# Altium PCB BSR033A.PcbDoc (part 2 of 2)
Units mil, origin at the board's own origin, x right, y up, seen from the top; angles counter-clockwise.
Board outline 1950 x 1400 mil, 2 copper layers (Top Layer, Bottom Layer), stack 61.2 mil thick; 52 components, 17 nets, 86 pads, 24 vias.
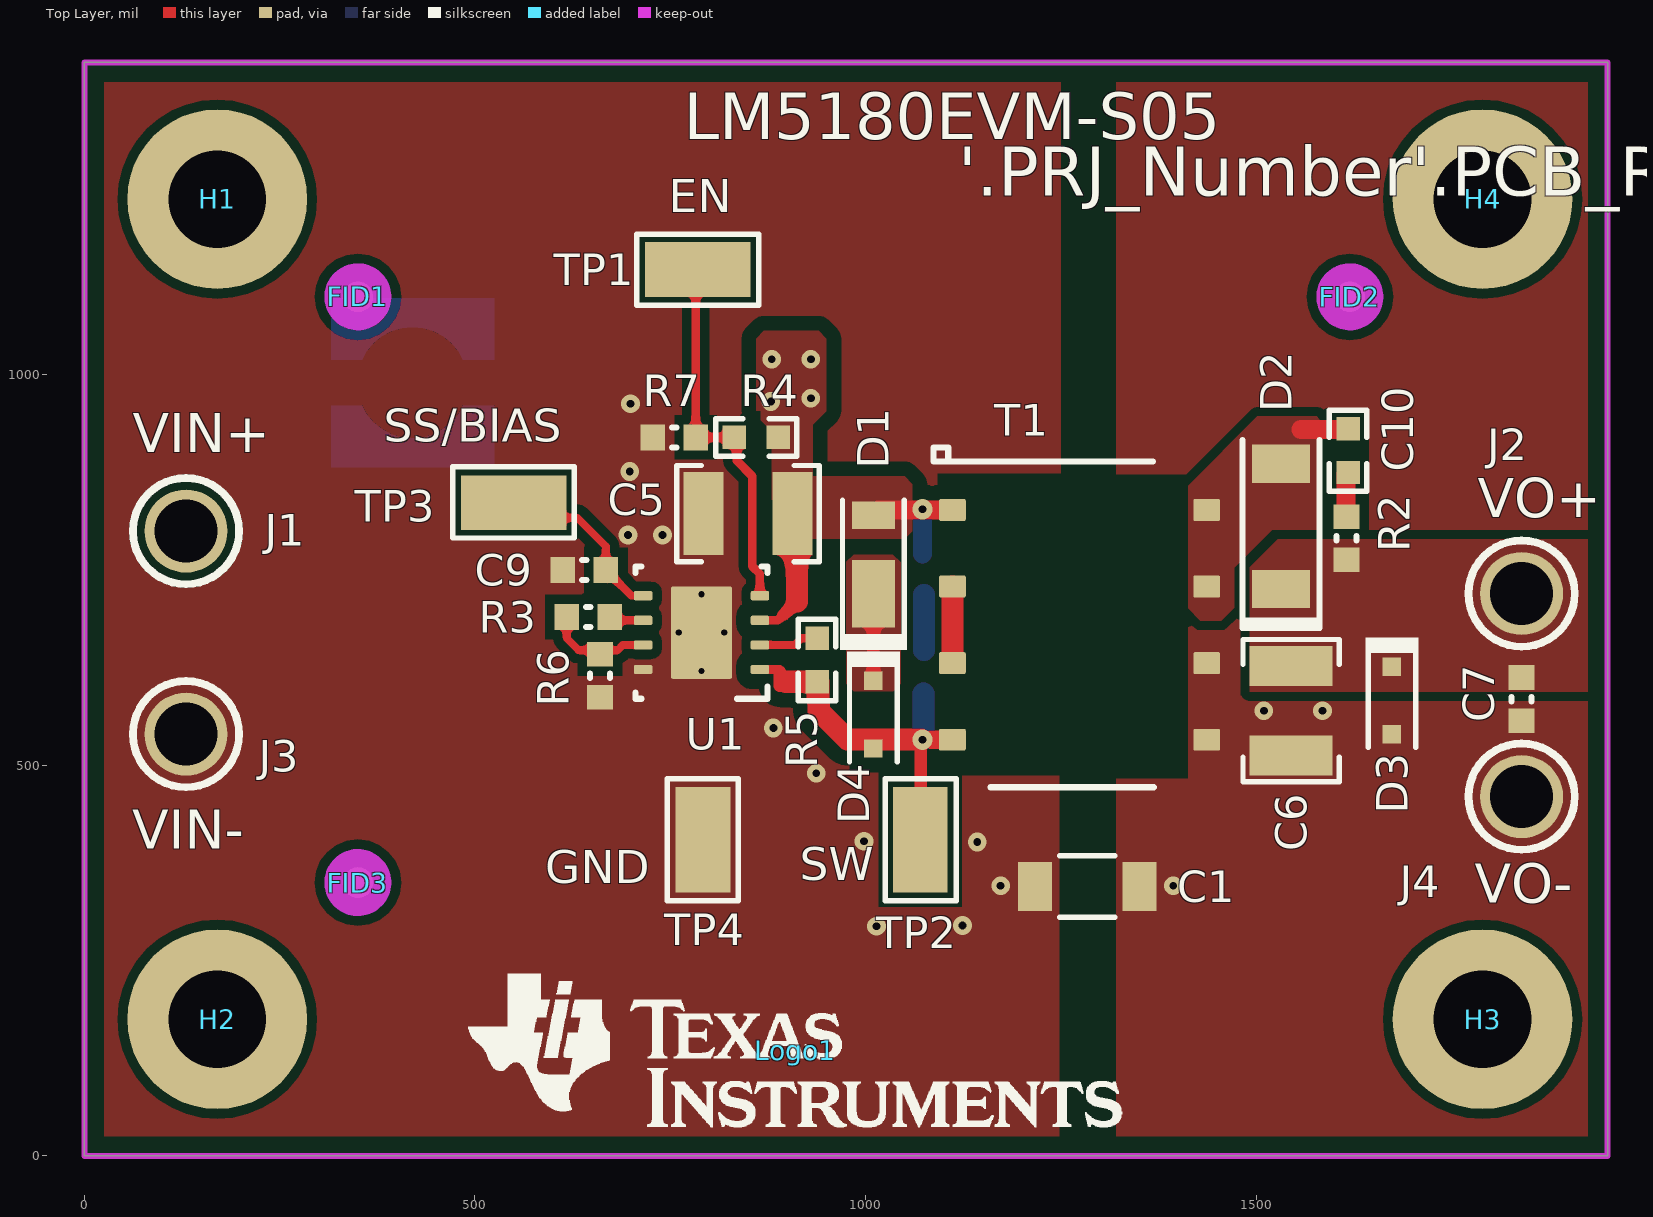
[diagram p0: Top Layer view]

## Silkscreen, mask and mechanical layers (free items; w line width, h text height) (continued)
M10 Fab Notes: (continued)
  text "OTHER +/-" at 12344.46,4510.85 h60
  text "DRILLING:" at 11243.46,4380.23 h60
  text "NC_DRILL FILES" at 13004.46,4275.04 h60
  text "REFERENCE:" at 11318.23,4271.1 h60
  text "X" at 11975.46,4271.01 h60
  text "AS SHOWN" at 12153.46,4271.1 h60
  text "X" at 12876.46,4271.1 h60
  text "OTHER" at 13302.46,4128.85 h60
  text "PTH COPPER THICKNESS:" at 11317.91,4125.32 h60
  text "X" at 12457.14,4125.32 h60
  text "20-30 um" at 12585.14,4125.32 h60
  text "BOARD FINISH:" at 11243.46,3977.73 h60
  text "SILKSCREEN:" at 11398.68,3867.6 h60
  text "X" at 12356.46,3867.6 h60
  text "TOP" at 12473.46,3867.6 h60
  text "X" at 12866.46,3867.6 h60
  text "BOTTOM" at 12984.46,3867.6 h60
  text "SILKSCREEN COLOR:" at 11398.68,3712.41 h60
  text "X" at 12355.46,3712.41 h60
  text "WHITE" at 12473.46,3712.41 h60
  text "OTHER" at 12984.46,3712.41 h60
  text "X" at 12486.46,3568.96 h60
  text "GREEN" at 12604.46,3568.96 h60
  text "OTHER" at 13222.46,3568.96 h60
  text "SOLDER RESIST COLOR:" at 11398.68,3562.1 h60
  text "X" at 12486.46,3414.71 h60
  text "MATTE" at 12604.46,3414.71 h60
  text "SEMI-GLOSS" at 13222,3414.07 h60
  text "IMMERSION GOLD (ENIG)" at 12304.46,3241.94 h60
  text "ENEPIG" at 13642,3234.72 h60
  text "SURFACE FINISH:" at 11243.46,3233.72 h60
  text "X" at 12126.46,3233.72 h60
  text "IMM. TIN/SILVER OR EQUIV" at 11573,3096.4 h60
  text "OTHER" at 13004.46,3092.47 h60
  text "ARRAY/PANEL:" at 11243.46,2937.09 h60
  text "CUT AND TRIM PER M1 BOARD OUTLINE" at 12304.46,2928.87 h60
  text "N.C. ROUTE" at 12304.46,2792.9 h60
  text "X" at 12992.46,2792.9 h60
  text "V. SCORE" at 13170.46,2792.9 h60
  text "CERTIFICATION:" at 11243.46,2663.77 h60
  text "MATERIALS AND WORKMANSHIP FOR ALL PCBS" at 11968.46,2663.77 h60
  text "TO MEET OR EXCEED THE REQUIREMENTS OF:" at 11968.46,2569.71 h60
  text "X" at 11605.97,2441.08 h60
  text "ANSI IPC-A-600F CLASS ->" at 11733.96,2441.08 h60
  text "X" at 13381.97,2441.08 h60
  text "2" at 13491.96,2441.08 h60
  text "1" at 13176.96,2439.58 h60
  text "3" at 13845.96,2439.58 h60
  text "X" at 12417.97,2293.39 h60
  text "RoHS" at 12545.96,2293.39 h60
  text "OTHER" at 13190.36,2293.39 h60
  text "PER ORDER" at 13587.42,2293.39 h60
  text "ALL BOARDS MUST MEET OR EXCEED UL94-V0 REQUIREMENTS." at 11271,2139.57 h60
  text "PCB MUST BEAR THE UL94V-0 UL REGISTERED MATERIAL ID NUMBER" at 11271,2023.5 h60
  text "ADDITIONAL REQUIREMENTS:" at 11243.46,1854.08 h60
  text "MICROSECTION:" at 11318.23,1746.95 h60
  text "YES" at 12223.96,1746.95 h60
  text "REQUIRED" at 13085.46,1602.62 h60
  text "BARE BOARD ELEC. TEST:" at 11318.23,1599.76 h60
  text "NONE" at 12623.96,1599.76 h60
  text "X" at 12967.46,1599.76 h60
  text "PER ORDER" at 13677.46,1599.76 h60
  text "XX MIL VIAS REQUIRE NON-CONDUCTIVE FILL AND PLANARIZE" at 11486.38,1394.82 h59
  text "XX MIL VIAS REQUIRE CONDUCTIVE FILL AND PLANARIZE" at 11494.38,1290.84 h60
  text "OUTER XX MIL VIAS REQUIRE 50 OHM SINGLE-ENDED IMPEDANCE" at 11493.39,1127.46 h58
  text "LAYER 2 & 3 (INNER LAYERS) XX MIL WIDE, XX MIL SPACE / TRACES REQUIRE 100 OHM DIFFERENTIAL IMPEDANCE" at 11485.39,891.74 h60
  text ".Layer_Name" at 487,-858.49 h60
M11 Gerber Information:
  lines w10: -382,-930.17 6218,-930.17 ; -382,-726.83 6220,-726.83 ; -382,-523.5 -382,-1133.5 3623,-1133.5 6220,-1133.5 6220,-523.5 -381.5,-523.5 -381.5,-1133.5 1194,-1133.5 ; 2083,-1133.5 2083,-523.5 ; 3350,-726.83 3350,-523.5 ; 4190,-726.83 4190,-523.5 ; 4812,-1140 4812,-937.17
  text "ALL ARTWORK VIEWED FROM TOP SIDE" at -318.5,-655.67 h60
  text "BOARD #:" at 2158,-655.67 h60
  text ".PRJ_Number" at 2703.5,-655.67 h60
  text "REV:" at 3548,-655.67 h60
  text ".PCB_Rev" at 3839.5,-655.67 h60
  text "SVN REV:" at 4386,-655.67 h60
  text ".VersionControl_RevNumber" at 4892,-655.67 h60
  text "LAYER NAME =" at -318.5,-858.49 h60
  text "TID #:" at 2158,-859 h60
  text ".TID" at 2703.5,-859 h60
  text "PLOT NAME =" at -318.5,-1064.34 h60
  text ".plot_File_Name" at 487,-1064.34 h60
  text "GENERATED    :" at 2160,-1064.34 h60
  text ".Print_Date" at 3029.5,-1064.34 h60
  text ".Print_Time" at 3758.5,-1064.34 h60
  text "TEXAS INSTRUMENTS" at 5023,-1064.34 h60
M12 Stackup:
  drawing of 191 lines, arcs and shapes, not listed
  text "Layer" at 9707.84,7830 h60
  text "Name" at 10117.76,7830 h60
  text "Material" at 11047.5,7830 h60
  text "Thickness" at 11907.27,7830 h60
  text "Constant" at 12557.1,7830 h60
  text "Board Layer Stack" at 13126.96,7830 h60
  text "1" at 9707.84,7710 h60
  text "Top Overlay" at 10117.76,7710 h60
  text "2" at 9707.84,7590 h60
  text "Top Solder" at 10117.76,7590 h60
  text "Solder Resist" at 11047.5,7590 h60
  text "0.40mil" at 11907.27,7590 h60
  text "3.5" at 12557.1,7590 h60
  text "3" at 9707.84,7470 h60
  text "Top Layer" at 10117.76,7470 h60
  text "Copper" at 11047.5,7470 h60
  text "1.40mil" at 11907.27,7470 h60
  text "4" at 9707.84,7350 h60
  text "Dielectric1" at 10117.76,7350 h60
  text "FR-4" at 11047.5,7350 h60
  text "58.40mil" at 11907.27,7350 h60
  text "4.8" at 12557.1,7350 h60
  text "5" at 9707.84,7230 h60
  text "Bottom Layer" at 10117.76,7230 h60
  text "Copper" at 11047.5,7230 h60
  text "1.40mil" at 11907.27,7230 h60
  text "6" at 9707.84,7110 h60
  text "Bottom Solder" at 10117.76,7110 h60
  text "Solder Resist" at 11047.5,7110 h60
  text "0.40mil" at 11907.27,7110 h60
  text "3.5" at 12557.1,7110 h60
  text "7" at 9707.84,6990 h60
  text "Bottom Overlay" at 10117.76,6990 h60
  text ".Layer_Name" at 487,-858.49 h60
M13 Component Bodies Top:
  text ".Layer_Name" at 487,-858.49 h60
M14 Component Bodies Bottom:
  text ".Layer_Name" at 487,-858.49 h60
M15 Courtyards Top:
  text ".Layer_Name" at 487,-858.49 h60
M16 Courtyards Bottom:
  text ".Layer_Name" at 487,-858.49 h60
Drill Drawing:
  lines w10: 5246.04,2866.37 5301.23,2866.37 5301.23,2921.56 5246.04,2921.56 5246.04,2866.37 ; 5246.04,3045.74 5301.23,3045.74 5273.63,2990.55 5246.04,3045.74 ; 5246.04,3128.52 5259.83,3128.52 5259.83,3114.72 5287.43,3114.72 5287.43,3128.52 5301.23,3128.52 5301.23,3156.12 5287.43,3156.12 5287.43,3169.91 5259.83,3169.91 5259.83,3156.12 5246.04,3156.12 5246.04,3128.52 ; 5246.04,3238.9 5273.63,3252.7 5301.23,3238.9 5287.43,3266.5 5301.23,3294.09 5273.63,3280.29 5246.04,3294.09 5259.83,3266.5 5246.04,3238.9
  lines w12: 5196,2829.12 8426.52,2829.12 ; 5196,3325.82 8426.52,3325.82 ; 5533.86,2704.94 5533.86,3450 ; 5865.86,2704.94 5865.86,3450 ; 6502.42,2704.94 6502.42,3450 ; 6761.53,2704.94 6761.53,3450 ; 7136.68,2704.94 7136.68,3450 ; 7860.06,2704.94 7860.06,3450 ; 5196,2704.94 8426.52,2704.94 8426.52,3450 5196,3450 5196,2704.94
  text "Symbol" at 5270.51,3363.08 h72
  text "Quantity" at 5571.11,3363.08 h72
  text "Finished Hole Size" at 5903.12,3363.08 h72
  text "Plated" at 6539.67,3363.08 h72
  text "Hole Type" at 6798.78,3363.08 h72
  text "Drill Layer Pair" at 7173.93,3363.08 h72
  text "Hole Tolerance" at 7897.32,3363.08 h72
  text "4" at 5571.11,3238.9 h60
  text "7.87mil (0.200mm)" at 5903.12,3238.9 h60
  text "PTH" at 6539.67,3238.9 h60
  text "Round" at 6798.78,3238.9 h60
  text "Top Layer - Bottom Layer" at 7173.93,3238.9 h60
  text "20" at 5571.11,3114.72 h60
  text "10.00mil (0.254mm)" at 5903.12,3114.72 h60
  text "PTH" at 6539.67,3114.72 h60
  text "Round" at 6798.78,3114.72 h60
  text "Top Layer - Bottom Layer" at 7173.93,3114.72 h60
  text "4" at 5571.11,2990.55 h60
  text "80.71mil (2.050mm)" at 5903.12,2990.55 h60
  text "PTH" at 6539.67,2990.55 h60
  text "Round" at 6798.78,2990.55 h60
  text "Top Layer - Bottom Layer" at 7173.93,2990.55 h60
  text "4" at 5571.11,2866.37 h60
  text "125.00mil (3.175mm)" at 5903.12,2866.37 h60
  text "PTH" at 6539.67,2866.37 h60
  text "Round" at 6798.78,2866.37 h60
  text "Top Layer - Bottom Layer" at 7173.93,2866.37 h60
  text "32 Total" at 5571.11,2742.2 h60
  text ".Layer_Name" at 487,-858.49 h60
M17 Embedded Cavity:
  text ".Layer_Name" at 487,-858.49 h60
M18 Embedded Assembly:
  text ".Layer_Name" at 487,-858.49 h60
M19 Embedded Keepout:
  text ".Layer_Name" at 487,-858.49 h60

## Dimensions
-90,-400 to 910,-400 on M2 Board Dimensions
0,0 to 1950,0 on M2 Board Dimensions
0,0 to 0,1400 on M2 Board Dimensions

## Text inside footprints (layer, text, board x,y; h text height)
Logo3: Bottom Overlay "not FCC approved for resale." at 1247.05,345.62 h60; Bottom Overlay "For evaluation only;" at 1134.67,399.01 h60